# EAGLE board Satellite_Transceiver_Function_Board__Swarm_M138-Panel (EAGLE 9.6.2), part 1 of 2
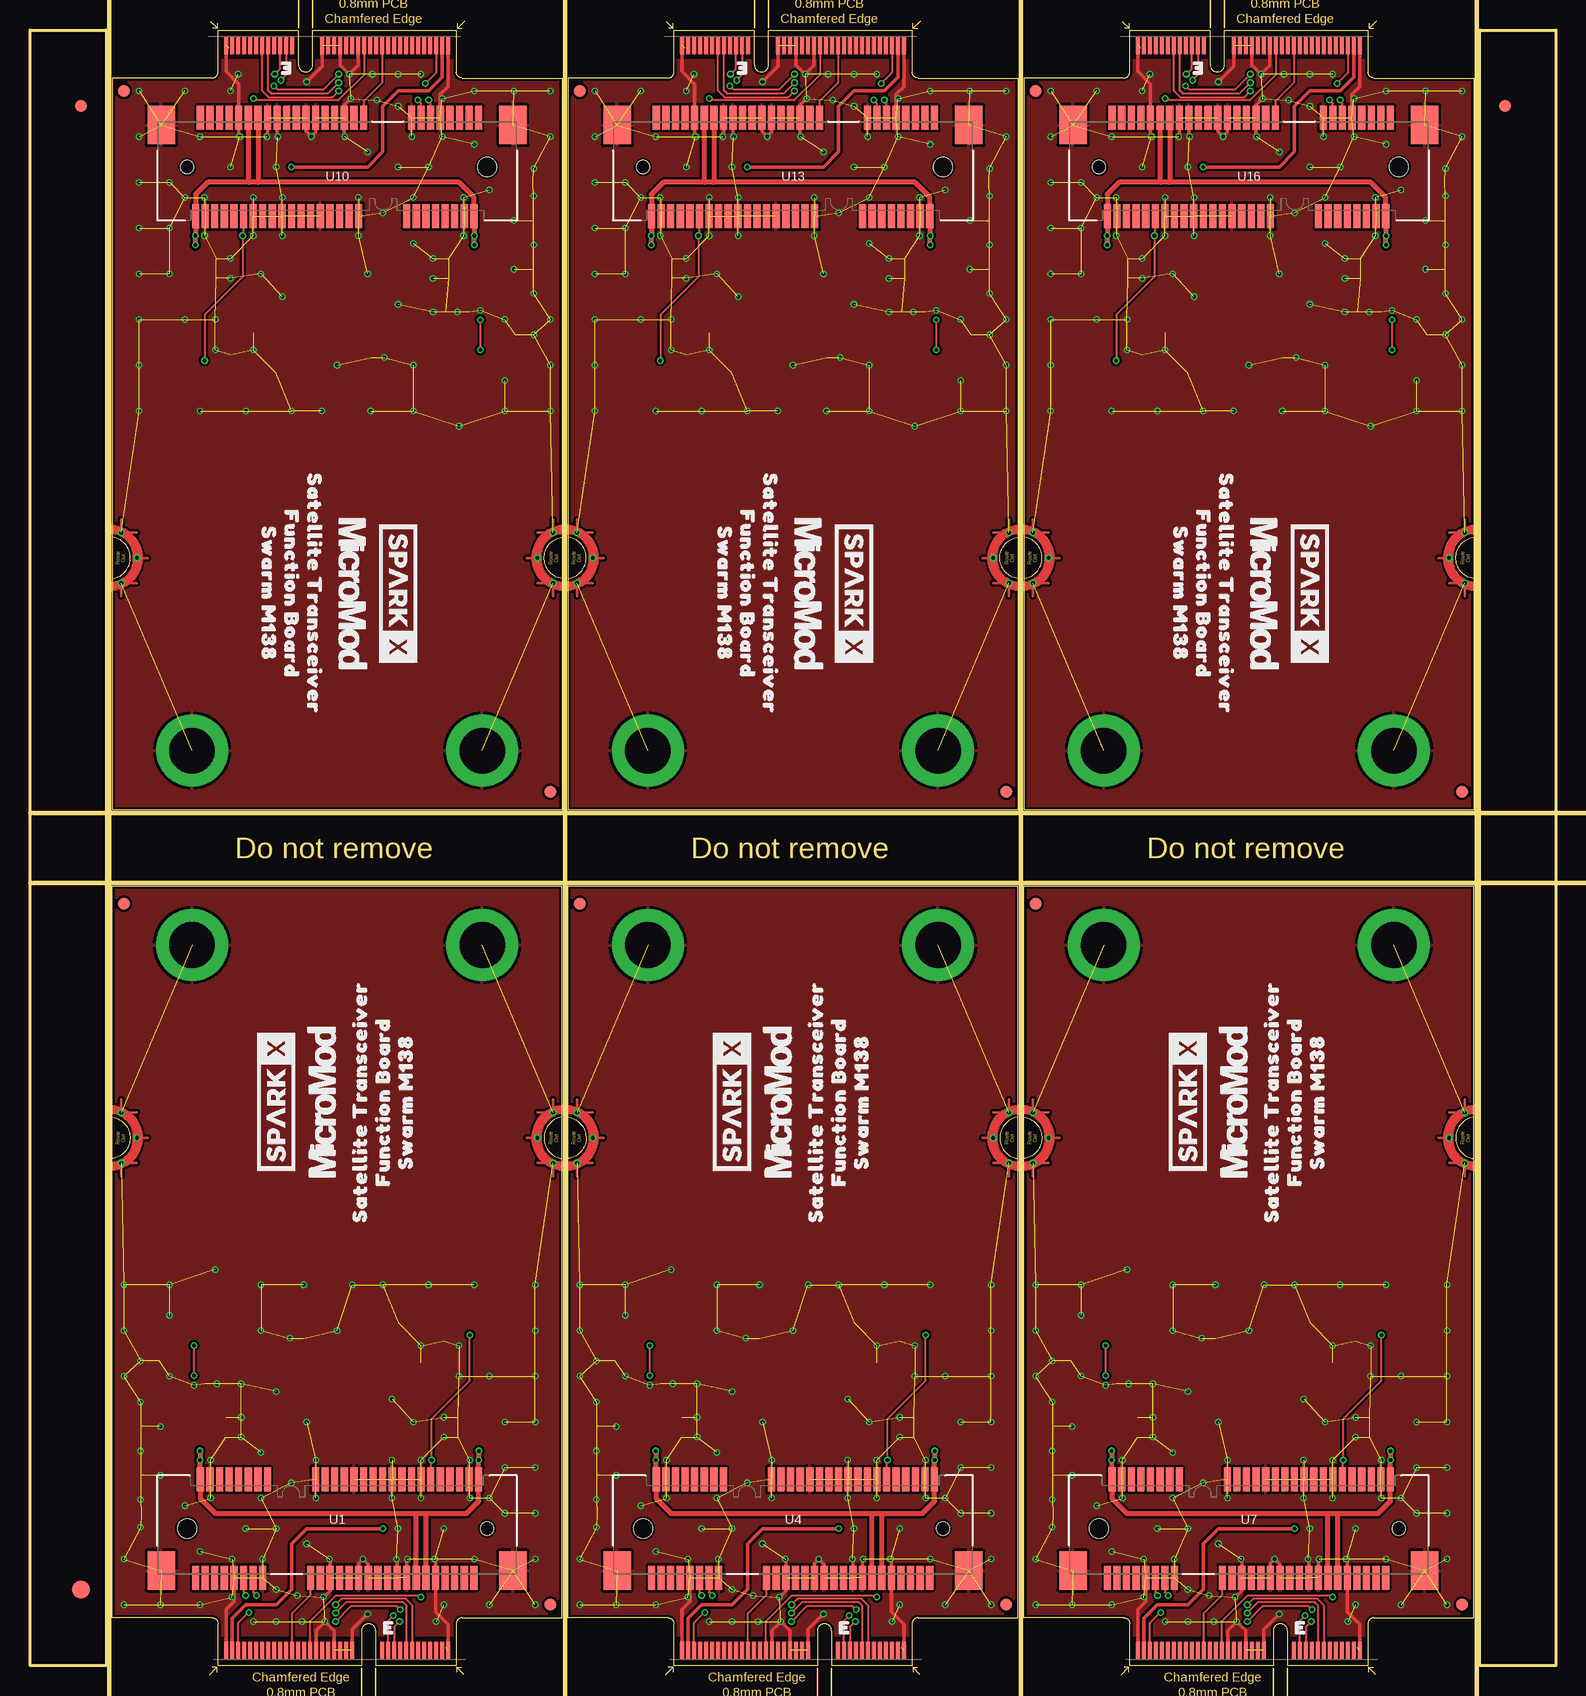
[diagram p0: board, top side]
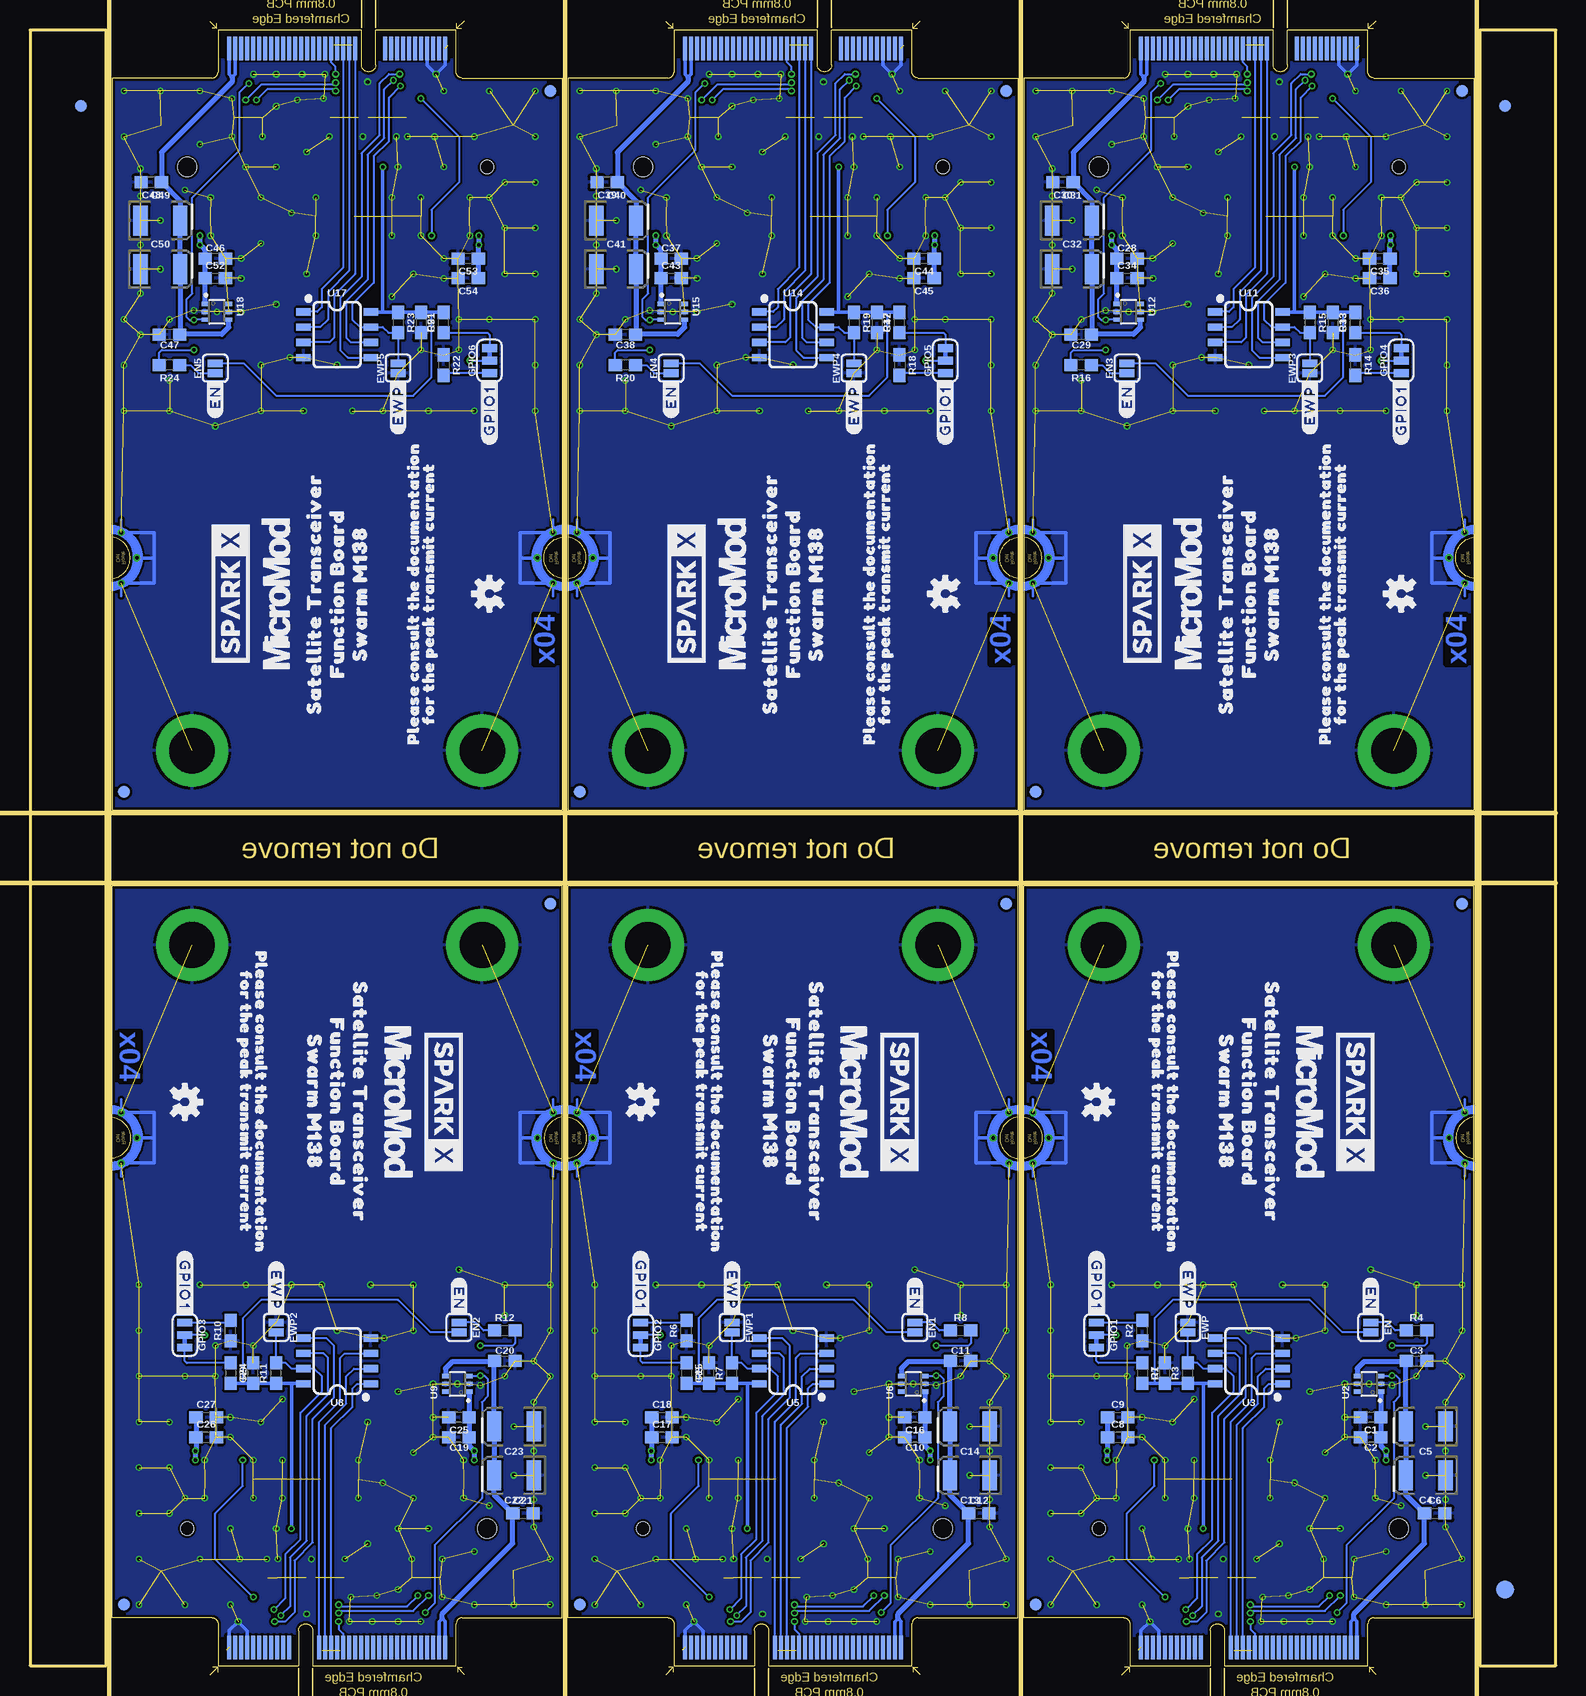
[diagram p1: board, bottom side, seen from below]

Size 127.21 x 136.35 mm. Coordinates in mm from the lower left corner, seen from the top.
Outline: 35.53,0 28.83,0 28.83,2.9 arc180 27.63,2.9 27.63,0 15.68,0 15.68,3.5 arc84 15.2,4 6.86,4 6.86,65 44.35,65 44.35,4 36,4 arc85 35.53,3.5 35.53,0
Outline: 73.53,0 66.83,0 66.83,2.9 arc180 65.63,2.9 65.63,0 53.68,0 53.68,3.5 arc84 53.2,4 44.86,4 44.86,65 82.35,65 82.35,4 74,4 arc85 73.53,3.5 73.53,0
Outline: 111.53,0 104.83,0 104.83,2.9 arc180 103.63,2.9 103.63,0 91.68,0 91.68,3.5 arc84 91.2,4 82.86,4 82.86,65 120.35,65 120.35,4 112,4 arc85 111.53,3.5 111.53,0
Outline: 15.68,136.35 22.38,136.35 22.38,133.45 arc180 23.58,133.45 23.58,136.35 35.53,136.35 35.53,132.85 arc84 36.01,132.35 44.35,132.35 44.35,71.35 6.86,71.35 6.86,132.35 15.21,132.35 arc85 15.68,132.85 15.68,136.35
Outline: 53.68,136.35 60.38,136.35 60.38,133.45 arc180 61.58,133.45 61.58,136.35 73.53,136.35 73.53,132.85 arc84 74,132.35 82.35,132.35 82.35,71.35 44.86,71.35 44.86,132.35 53.2,132.35 arc85 53.68,132.85 53.68,136.35
Outline: 91.68,136.35 98.38,136.35 98.38,133.45 arc180 99.58,133.45 99.58,136.35 111.53,136.35 111.53,132.85 arc84 112.01,132.35 120.35,132.35 120.35,71.35 82.86,71.35 82.86,132.35 91.2,132.35 arc85 91.68,132.85 91.68,136.35
Outline: 120.86,136.35 127.21,136.35 127.21,0 120.86,0 120.86,136.35
Outline: 0,136.35 6.35,136.35 6.35,0 0,0 0,136.35
Copper layers (1*16): Top 0.035mm / dielectric 1.5mm / Bottom 0.035mm
Design rules "Satellite_Transceiver_Function_Board__Swarm_M138": minimum track width 5mil, minimum drill 0.3mm, track to track 5mil, track to pad 5mil, pad to pad 5mil, via to via 5mil, smd to smd 5mil, copper to edge 7mil, drill to drill 7mil, minimum pad ring 5mil, minimum via ring 5mil, stop-mask expansion 2.5mil, vias tented up to drill 25mil, thermal gap 10mil
Net classes: 10 DIGITAL: width 0.09 mm, clearance 0.1 mm to class 0, clearance 0.1 mm to class 1, clearance 0.1 mm
tRestrict: 12 lines
Milling: 6 lines

## Footprints (pad centres in the part's own frame; a part is rotated, then mirrored left to right if it is on the bottom)
0603 = smd 1.1 x 1: 1 -0.85,0; 2 0.85,0
EIA3528 = smd 1.2 x 2.5: A 1.65,0; C -1.65,0
FIDUCIAL-1X2 = smd 1 x 1: 1 0,0
FIDUCIAL-1.5X3 = smd 1.5 x 1.5: 1 0,0
SMT-JUMPER_2_NO_SILK = smd 0.635 x 1.27: 1 -0.406,0; 2 0.406,0
SMT-JUMPER_3_1-NC_TRACE_SILK = smd 0.66 x 1.27: 1 -1.041,0; 2 0,0; 3 1.041,0
STAND-OFF-REFLOW-M2.5 = drill 3.8 pad 6: 1 0,0
M.2-CARD-E-22_FUNCTION_STANDARD = smd 0.35 x 1.45: 1 9.25,1.275; 3 8.75,1.275; 5 8.25,1.275; 7 7.75,1.275; 9 7.25,1.275; 11 6.75,1.275; 13 6.25,1.275; 15 5.75,1.275; 17 5.25,1.275; 19 4.75,1.275; 21 4.25,1.275; 23 3.75,1.275; 33 1.25,1.275; 35 0.75,1.275; 37 0.25,1.275; 39 -0.25,1.275; 41 -0.75,1.275; 43 -1.25,1.275; 45 -1.75,1.275; 47 -2.25,1.275; 49 -2.75,1.275; 51 -3.25,1.275; 53 -3.75,1.275; 55 -4.25,1.275; 57 -4.75,1.275; 59 -5.25,1.275; 61 -5.75,1.275; 63 -6.25,1.275; 65 -6.75,1.275; 67 -7.25,1.275; 69 -7.75,1.275; 71 -8.25,1.275; 73 -8.75,1.275; 75 -9.25,1.275 | smd 0.35 x 1.95 bottom: 2 9,1.525; 4 8.5,1.525; 6 8,1.525; 8 7.5,1.525; 10 7,1.525; 12 6.5,1.525; 14 6,1.525; 16 5.5,1.525; 18 5,1.525; 20 4.5,1.525; 22 4,1.525; 32 1.5,1.525; 34 1,1.525; 36 0.5,1.525; 38 0,1.525; 40 -0.5,1.525; 42 -1,1.525; 44 -1.5,1.525; 46 -2,1.525; 48 -2.5,1.525; 50 -3,1.525; 52 -3.5,1.525; 54 -4,1.525; 56 -4.5,1.525; 58 -5,1.525; 60 -5.5,1.525; 62 -6,1.525; 64 -6.5,1.525; 66 -7,1.525; 68 -7.5,1.525; 70 -8,1.525; 72 -8.5,1.525; 74 -9,1.525 | drill 0.305 pad 0.61: GND1 -18,41.9; GND2 -16.7,44; GND3 -18,46.1; GND4 18,41.9; GND5 16.7,44; GND6 18,46.1
M.2-SWARM-M138-A = smd 0.6 x 2: 1 -11.8,-4.1; 2 -11.4,4.1; 3 -11,-4.1; 4 -10.6,4.1; 5 -10.2,-4.1; 6 -9.8,4.1; 7 -9.4,-4.1; 8 -9,4.1; 9 -8.6,-4.1; 10 -8.2,4.1; 11 -7.8,-4.1; 12 -7.4,4.1; 13 -7,-4.1; 14 -6.6,4.1; 15 -6.2,-4.1; 16 -5.8,4.1; 17 -2.2,-4.1; 18 -1.8,4.1; 19 -1.4,-4.1; 20 -1,4.1; 21 -0.6,-4.1; 22 -0.2,4.1; 23 0.2,-4.1; 24 0.6,4.1; 25 1,-4.1; 26 1.4,4.1; 27 1.8,-4.1; 28 2.2,4.1; 29 2.6,-4.1; 30 3,4.1; 31 3.4,-4.1; 32 3.8,4.1; 33 4.2,-4.1; 34 4.6,4.1; 35 5,-4.1; 36 5.4,4.1; 37 5.8,-4.1; 38 6.2,4.1; 39 6.6,-4.1; 40 7,4.1; 41 7.4,-4.1; 42 7.8,4.1; 43 8.2,-4.1; 44 8.6,4.1; 45 9,-4.1; 46 9.4,4.1; 47 9.8,-4.1; 48 10.2,4.1; 49 10.6,-4.1; 50 11,4.1; 51 11.4,-4.1; 52 11.8,4.1 | smd 2.3 x 3.2: A1 -14.65,-3.5; A2 14.65,-3.5 | hole 1.1: 12.5,0 | hole 1.6: -12.5,0
SC-70-6 = smd 0.35 x 0.6: 1 -0.65,-1; 2 0,-1; 3 0.65,-1; 4 0.65,1; 5 0,1; 6 -0.65,1
SO08 = smd 0.6 x 1.2: 1 -1.905,-2.8; 2 -0.635,-2.8; 3 0.635,-2.8; 4 1.905,-2.8; 5 1.905,2.8; 6 0.635,2.8; 7 -0.635,2.8; 8 -1.905,2.8

## Placement (x,y rotation side)
C1  10uF  [0603]  15.44,20.7 180 bottom
C2  0.1uF  [0603]  15.44,19.05 180 bottom
C3  0.1uF  [0603]  11.63,25.4 0 bottom
C4  100uF  [EIA3528]  10.87,15.88 180 bottom
C5  100uF  [EIA3528]  10.87,19.94 180 bottom
C6  0.1uF  [0603]  10.11,12.7 0 bottom
C7  0.1uF  [0603]  32.59,24.38 90 bottom
C8  0.1uF  [0603]  36.53,19.05 0 bottom
C9  10uF  [0603]  36.53,20.7 0 bottom
C10  0.1uF  [0603]  53.44,19.05 180 bottom
C11  0.1uF  [0603]  49.63,25.4 0 bottom
C12  0.1uF  [0603]  48.11,12.7 0 bottom
C13  100uF  [EIA3528]  48.87,15.88 180 bottom
C14  100uF  [EIA3528]  48.87,19.94 180 bottom
C15  0.1uF  [0603]  70.59,24.38 90 bottom
C16  10uF  [0603]  53.44,20.7 180 bottom
C17  0.1uF  [0603]  74.53,19.05 0 bottom
C18  10uF  [0603]  74.53,20.7 0 bottom
C19  0.1uF  [0603]  91.44,19.05 180 bottom
C20  0.1uF  [0603]  87.63,25.4 0 bottom
C21  0.1uF  [0603]  86.11,12.7 0 bottom
C22  100uF  [EIA3528]  86.87,15.88 180 bottom
C23  100uF  [EIA3528]  86.87,19.94 180 bottom
C24  0.1uF  [0603]  108.59,24.38 90 bottom
C25  10uF  [0603]  91.44,20.7 180 bottom
C26  0.1uF  [0603]  112.52,19.05 0 bottom
C27  10uF  [0603]  112.52,20.7 0 bottom
C28  0.1uF  [0603]  35.77,117.3 0 bottom
C29  0.1uF  [0603]  39.58,110.95 180 bottom
C30  0.1uF  [0603]  41.1,123.65 180 bottom
C31  100uF  [EIA3528]  40.34,120.47 0 bottom
C32  100uF  [EIA3528]  40.34,116.41 0 bottom
C33  0.1uF  [0603]  18.62,111.97 270 bottom
C34  10uF  [0603]  35.77,115.65 0 bottom
C35  0.1uF  [0603]  14.68,117.3 180 bottom
C36  10uF  [0603]  14.68,115.65 180 bottom
C37  0.1uF  [0603]  73.76,117.3 0 bottom
C38  0.1uF  [0603]  77.57,110.95 180 bottom
C39  0.1uF  [0603]  79.1,123.65 180 bottom
C40  100uF  [EIA3528]  78.34,120.47 0 bottom
C41  100uF  [EIA3528]  78.34,116.41 0 bottom
C42  0.1uF  [0603]  56.62,111.97 270 bottom
C43  10uF  [0603]  73.76,115.65 0 bottom
C44  0.1uF  [0603]  52.68,117.3 180 bottom
C45  10uF  [0603]  52.68,115.65 180 bottom
C46  0.1uF  [0603]  111.77,117.3 0 bottom
C47  0.1uF  [0603]  115.58,110.95 180 bottom
C48  0.1uF  [0603]  117.1,123.65 180 bottom
C49  100uF  [EIA3528]  116.34,120.47 0 bottom
C50  100uF  [EIA3528]  116.34,116.41 0 bottom
C51  0.1uF  [0603]  94.62,111.97 270 bottom
C52  10uF  [0603]  111.77,115.65 0 bottom
C53  0.1uF  [0603]  90.68,117.3 180 bottom
C54  10uF  [0603]  90.68,115.65 180 bottom
E$1  [FIDUCIAL-1X2]  4.23,130 0 top
E$2  [FIDUCIAL-1X2]  4.23,130 0 bottom
E$3  [FIDUCIAL-1X2]  122.97,130 0 top
E$4  [FIDUCIAL-1X2]  122.97,130 0 bottom
E$5  [FIDUCIAL-1.5X3]  4.23,6.35 0 top
E$6  [FIDUCIAL-1.5X3]  4.23,6.35 0 bottom
EN  JUMPER-SMT_2_NO_SILK  [SMT-JUMPER_2_NO_SILK]  15.44,28.19 270 bottom
EN1  JUMPER-SMT_2_NO_SILK  [SMT-JUMPER_2_NO_SILK]  53.44,28.19 270 bottom
EN2  JUMPER-SMT_2_NO_SILK  [SMT-JUMPER_2_NO_SILK]  91.44,28.19 270 bottom
EN3  JUMPER-SMT_2_NO_SILK  [SMT-JUMPER_2_NO_SILK]  35.77,108.16 90 bottom
EN4  JUMPER-SMT_2_NO_SILK  [SMT-JUMPER_2_NO_SILK]  73.76,108.16 90 bottom
EN5  JUMPER-SMT_2_NO_SILK  [SMT-JUMPER_2_NO_SILK]  111.77,108.16 90 bottom
EWP  JUMPER-SMT_2_NO_SILK  [SMT-JUMPER_2_NO_SILK]  30.68,28.19 270 bottom
EWP1  JUMPER-SMT_2_NO_SILK  [SMT-JUMPER_2_NO_SILK]  68.68,28.19 270 bottom
EWP2  JUMPER-SMT_2_NO_SILK  [SMT-JUMPER_2_NO_SILK]  106.68,28.19 270 bottom
EWP3  JUMPER-SMT_2_NO_SILK  [SMT-JUMPER_2_NO_SILK]  20.53,108.16 90 bottom
EWP4  JUMPER-SMT_2_NO_SILK  [SMT-JUMPER_2_NO_SILK]  58.52,108.16 90 bottom
EWP5  JUMPER-SMT_2_NO_SILK  [SMT-JUMPER_2_NO_SILK]  96.53,108.16 90 bottom
FD1  FIDUCIAL1X2  [FIDUCIAL-1X2]  43.38,5.08 0 top
FD2  FIDUCIAL1X2  [FIDUCIAL-1X2]  43.38,5.08 0 bottom
FD3  FIDUCIAL1X2  [FIDUCIAL-1X2]  7.82,63.5 0 top
FD4  FIDUCIAL1X2  [FIDUCIAL-1X2]  7.82,63.5 0 bottom
FD5  FIDUCIAL1X2  [FIDUCIAL-1X2]  81.38,5.08 0 top
FD6  FIDUCIAL1X2  [FIDUCIAL-1X2]  81.38,5.08 0 bottom
FD7  FIDUCIAL1X2  [FIDUCIAL-1X2]  45.82,63.5 0 top
FD8  FIDUCIAL1X2  [FIDUCIAL-1X2]  45.82,63.5 0 bottom
FD9  FIDUCIAL1X2  [FIDUCIAL-1X2]  119.38,5.08 0 top
FD10  FIDUCIAL1X2  [FIDUCIAL-1X2]  119.38,5.08 0 bottom
FD11  FIDUCIAL1X2  [FIDUCIAL-1X2]  83.82,63.5 0 top
FD12  FIDUCIAL1X2  [FIDUCIAL-1X2]  83.82,63.5 0 bottom
FD13  FIDUCIAL1X2  [FIDUCIAL-1X2]  7.83,131.27 180 top
FD14  FIDUCIAL1X2  [FIDUCIAL-1X2]  7.83,131.27 180 bottom
FD15  FIDUCIAL1X2  [FIDUCIAL-1X2]  43.39,72.85 180 top
FD16  FIDUCIAL1X2  [FIDUCIAL-1X2]  43.39,72.85 180 bottom
FD17  FIDUCIAL1X2  [FIDUCIAL-1X2]  45.82,131.27 180 top
FD18  FIDUCIAL1X2  [FIDUCIAL-1X2]  45.82,131.27 180 bottom
FD19  FIDUCIAL1X2  [FIDUCIAL-1X2]  81.38,72.85 180 top
FD20  FIDUCIAL1X2  [FIDUCIAL-1X2]  81.38,72.85 180 bottom
FD21  FIDUCIAL1X2  [FIDUCIAL-1X2]  83.83,131.27 180 top
FD22  FIDUCIAL1X2  [FIDUCIAL-1X2]  83.83,131.27 180 bottom
FD23  FIDUCIAL1X2  [FIDUCIAL-1X2]  119.39,72.85 180 top
FD24  FIDUCIAL1X2  [FIDUCIAL-1X2]  119.39,72.85 180 bottom
GPIO1  JUMPER-SMT_3_1-NC_TRACE_SILK  [SMT-JUMPER_3_1-NC_TRACE_SILK]  38.3,27.56 270 bottom
GPIO2  JUMPER-SMT_3_1-NC_TRACE_SILK  [SMT-JUMPER_3_1-NC_TRACE_SILK]  76.3,27.56 270 bottom
GPIO3  JUMPER-SMT_3_1-NC_TRACE_SILK  [SMT-JUMPER_3_1-NC_TRACE_SILK]  114.3,27.56 270 bottom
GPIO4  JUMPER-SMT_3_1-NC_TRACE_SILK  [SMT-JUMPER_3_1-NC_TRACE_SILK]  12.91,108.79 90 bottom
GPIO5  JUMPER-SMT_3_1-NC_TRACE_SILK  [SMT-JUMPER_3_1-NC_TRACE_SILK]  50.9,108.79 90 bottom
GPIO6  JUMPER-SMT_3_1-NC_TRACE_SILK  [SMT-JUMPER_3_1-NC_TRACE_SILK]  88.91,108.79 90 bottom
H1  STAND-OFF-REFLOW-M2.5_1.5MM_TALL  [STAND-OFF-REFLOW-M2.5]  51.5,60.08 0 top
H2  STAND-OFF-REFLOW-M2.5_1.5MM_TALL  [STAND-OFF-REFLOW-M2.5]  75.7,60.08 0 top
H3  STAND-OFF-REFLOW-M2.5_1.5MM_TALL  [STAND-OFF-REFLOW-M2.5]  89.5,60.08 0 top
H4  STAND-OFF-REFLOW-M2.5_1.5MM_TALL  [STAND-OFF-REFLOW-M2.5]  113.7,60.08 0 top
H5  STAND-OFF-REFLOW-M2.5_1.5MM_TALL  [STAND-OFF-REFLOW-M2.5]  13.5,60.08 0 top
H6  STAND-OFF-REFLOW-M2.5_1.5MM_TALL  [STAND-OFF-REFLOW-M2.5]  37.7,60.08 0 top
H7  STAND-OFF-REFLOW-M2.5_1.5MM_TALL  [STAND-OFF-REFLOW-M2.5]  37.71,76.27 180 top
H8  STAND-OFF-REFLOW-M2.5_1.5MM_TALL  [STAND-OFF-REFLOW-M2.5]  13.51,76.27 180 top
H9  STAND-OFF-REFLOW-M2.5_1.5MM_TALL  [STAND-OFF-REFLOW-M2.5]  75.7,76.27 180 top
H10  STAND-OFF-REFLOW-M2.5_1.5MM_TALL  [STAND-OFF-REFLOW-M2.5]  51.5,76.27 180 top
H11  STAND-OFF-REFLOW-M2.5_1.5MM_TALL  [STAND-OFF-REFLOW-M2.5]  113.71,76.27 180 top
H12  STAND-OFF-REFLOW-M2.5_1.5MM_TALL  [STAND-OFF-REFLOW-M2.5]  89.5,76.27 180 top
J1  MICROMOD_FUNCTION_STANDARD  [M.2-CARD-E-22_FUNCTION_STANDARD]  63.6,0 0 top
J2  MICROMOD_FUNCTION_STANDARD  [M.2-CARD-E-22_FUNCTION_STANDARD]  101.6,0 0 top
J3  MICROMOD_FUNCTION_STANDARD  [M.2-CARD-E-22_FUNCTION_STANDARD]  25.6,0 0 top
J4  MICROMOD_FUNCTION_STANDARD  [M.2-CARD-E-22_FUNCTION_STANDARD]  25.61,136.35 180 top
J5  MICROMOD_FUNCTION_STANDARD  [M.2-CARD-E-22_FUNCTION_STANDARD]  63.6,136.35 180 top
J6  MICROMOD_FUNCTION_STANDARD  [M.2-CARD-E-22_FUNCTION_STANDARD]  101.61,136.35 180 top
LOGO1  OSHW-LOGOS  [OSHW-LOGO-S]  76.3,46.99 270 bottom
LOGO2  OSHW-LOGOS  [OSHW-LOGO-S]  38.3,46.99 270 bottom
LOGO3  OSHW-LOGOS  [OSHW-LOGO-S]  114.3,46.99 270 bottom
LOGO4  OSHW-LOGOS  [OSHW-LOGO-S]  12.91,89.36 90 bottom
LOGO5  OSHW-LOGOS  [OSHW-LOGO-S]  50.9,89.36 90 bottom
LOGO6  OSHW-LOGOS  [OSHW-LOGO-S]  88.91,89.36 90 bottom
R1  100k  [0603]  34.49,24.38 270 bottom
R2  100k  [0603]  34.49,27.94 90 bottom
R3  100k  [0603]  30.68,24.38 90 bottom
R4  100k  [0603]  11.63,27.94 0 bottom
R5  100k  [0603]  72.49,24.38 270 bottom
R6  100k  [0603]  72.49,27.94 90 bottom
R7  100k  [0603]  68.68,24.38 90 bottom
R8  100k  [0603]  49.63,27.94 0 bottom
R9  100k  [0603]  110.49,24.38 270 bottom
R10  100k  [0603]  110.49,27.94 90 bottom
R11  100k  [0603]  106.68,24.38 90 bottom
R12  100k  [0603]  87.63,27.94 0 bottom
R13  100k  [0603]  16.72,111.97 90 bottom
R14  100k  [0603]  16.72,108.41 270 bottom
R15  100k  [0603]  20.53,111.97 270 bottom
R16  100k  [0603]  39.58,108.41 180 bottom
R17  100k  [0603]  54.71,111.97 90 bottom
R18  100k  [0603]  54.71,108.41 270 bottom
R19  100k  [0603]  58.52,111.97 270 bottom
R20  100k  [0603]  77.57,108.41 180 bottom
R21  100k  [0603]  92.72,111.97 90 bottom
R22  100k  [0603]  92.72,108.41 270 bottom
R23  100k  [0603]  96.53,111.97 270 bottom
R24  100k  [0603]  115.58,108.41 180 bottom
U1  SWARM_M138_TRANSCEIVER_MAIN  [M.2-SWARM-M138-A]  25.6,11.43 0 top
U2  MIC94064YC6  [SC-70-6]  15.57,23.5 90 bottom
U3  EEPROM  [SO08]  25.6,25.4 90 bottom
U4  SWARM_M138_TRANSCEIVER_MAIN  [M.2-SWARM-M138-A]  63.6,11.43 0 top
U5  EEPROM  [SO08]  63.6,25.4 90 bottom
U6  MIC94064YC6  [SC-70-6]  53.57,23.5 90 bottom
U7  SWARM_M138_TRANSCEIVER_MAIN  [M.2-SWARM-M138-A]  101.6,11.43 0 top
U8  EEPROM  [SO08]  101.6,25.4 90 bottom
U9  MIC94064YC6  [SC-70-6]  91.57,23.5 90 bottom
U10  SWARM_M138_TRANSCEIVER_MAIN  [M.2-SWARM-M138-A]  25.61,124.92 180 top
U11  EEPROM  [SO08]  25.61,110.95 270 bottom
U12  MIC94064YC6  [SC-70-6]  35.64,112.85 270 bottom
U13  SWARM_M138_TRANSCEIVER_MAIN  [M.2-SWARM-M138-A]  63.6,124.92 180 top
U14  EEPROM  [SO08]  63.6,110.95 270 bottom
U15  MIC94064YC6  [SC-70-6]  73.64,112.85 270 bottom
U16  SWARM_M138_TRANSCEIVER_MAIN  [M.2-SWARM-M138-A]  101.61,124.92 180 top
U17  EEPROM  [SO08]  101.61,110.95 270 bottom
U18  MIC94064YC6  [SC-70-6]  111.64,112.85 270 bottom
U$1  SPARKX-LOGO5  [SPARKX-LARGE]  16.71,46.99 270 bottom
U$2  SPARKX-LOGO5  [SPARKX-LARGE]  20.52,46.99 90 top
U$3  [FUNCTION_BOARD0]  29.41,46.99 90 top
U$4  [SATELLITE_TRANSCEIVER0]  27.51,46.99 90 top
U$5  [SATELLITE_TRANSCEIVER0]  23.7,46.99 270 bottom
U$6  [PLEASE_CONSULT_THE_DOCUMENTATION0]  31.95,46.99 270 bottom
U$7  [FUNCTION_BOARD0]  25.6,46.99 270 bottom
U$8  [#EWP#0]  30.68,28.96 270 bottom
U$9  [MICROMOD_LOGO_.5]  24.33,46.99 90 top
U$10  [MICROMOD_LOGO_.5]  20.52,46.99 270 bottom
U$11  [#EN#0]  15.44,28.96 270 bottom
U$12  SPARKX-LOGO5  [SPARKX-LARGE]  54.71,46.99 270 bottom
U$13  SPARKX-LOGO5  [SPARKX-LARGE]  58.52,46.99 90 top
U$14  [#GPIO1#0]  76.3,28.96 270 bottom
U$15  [SWARM_M1381]  69.32,46.99 90 top
U$16  [SWARM_M1381]  65.51,46.99 270 bottom
U$17  [PLEASE_CONSULT_THE_DOCUMENTATION0]  69.95,46.99 270 bottom
U$18  [FOR_THE_PEAK_TRANSMIT_CURRENT1]  71.22,46.99 270 bottom
U$19  [#GPIO1#0]  38.3,28.96 270 bottom
U$20  [FUNCTION_BOARD0]  67.41,46.99 90 top
U$21  [SATELLITE_TRANSCEIVER0]  65.51,46.99 90 top
U$22  [SATELLITE_TRANSCEIVER0]  61.7,46.99 270 bottom
U$23  [FUNCTION_BOARD0]  63.6,46.99 270 bottom
U$24  [#EWP#0]  68.68,28.96 270 bottom
U$25  [MICROMOD_LOGO_.5]  62.33,46.99 90 top
U$26  [MICROMOD_LOGO_.5]  58.52,46.99 270 bottom
U$27  [#EN#0]  53.44,28.96 270 bottom
U$28  SPARKX-LOGO5  [SPARKX-LARGE]  92.71,46.99 270 bottom
U$29  SPARKX-LOGO5  [SPARKX-LARGE]  96.52,46.99 90 top
U$30  [#GPIO1#0]  114.3,28.96 270 bottom
U$31  [FOR_THE_PEAK_TRANSMIT_CURRENT1]  33.22,46.99 270 bottom
U$32  [SWARM_M1381]  107.32,46.99 90 top
U$33  [SWARM_M1381]  103.51,46.99 270 bottom
U$34  [PLEASE_CONSULT_THE_DOCUMENTATION0]  107.95,46.99 270 bottom
U$35  [FOR_THE_PEAK_TRANSMIT_CURRENT1]  109.22,46.99 270 bottom
U$36  [FUNCTION_BOARD0]  105.41,46.99 90 top
U$37  [SATELLITE_TRANSCEIVER0]  103.51,46.99 90 top
U$38  [SATELLITE_TRANSCEIVER0]  99.7,46.99 270 bottom
U$39  [FUNCTION_BOARD0]  101.6,46.99 270 bottom
U$40  [SWARM_M1381]  31.32,46.99 90 top
U$41  [SWARM_M1381]  27.51,46.99 270 bottom
U$42  [#EWP#0]  106.68,28.96 270 bottom
U$43  [MICROMOD_LOGO_.5]  100.33,46.99 90 top
U$44  [MICROMOD_LOGO_.5]  96.52,46.99 270 bottom
U$45  [#EN#0]  91.44,28.96 270 bottom
U$46  SPARKX-LOGO5  [SPARKX-LARGE]  34.5,89.36 90 bottom
U$47  SPARKX-LOGO5  [SPARKX-LARGE]  30.69,89.36 270 top
U$48  [#GPIO1#0]  12.91,107.39 90 bottom
U$49  [SWARM_M1381]  19.89,89.36 270 top
U$50  [SWARM_M1381]  23.7,89.36 90 bottom
U$51  [PLEASE_CONSULT_THE_DOCUMENTATION0]  19.26,89.36 90 bottom
U$52  [FOR_THE_PEAK_TRANSMIT_CURRENT1]  17.99,89.36 90 bottom
U$53  [FUNCTION_BOARD0]  21.8,89.36 270 top
U$54  [SATELLITE_TRANSCEIVER0]  23.7,89.36 270 top
U$55  [SATELLITE_TRANSCEIVER0]  27.51,89.36 90 bottom
U$56  [FUNCTION_BOARD0]  25.61,89.36 90 bottom
U$57  [#EWP#0]  20.53,107.39 90 bottom
U$58  [MICROMOD_LOGO_.5]  26.88,89.36 270 top
U$59  [MICROMOD_LOGO_.5]  30.69,89.36 90 bottom
U$60  [#EN#0]  35.77,107.39 90 bottom
U$61  SPARKX-LOGO5  [SPARKX-LARGE]  72.49,89.36 90 bottom
U$62  SPARKX-LOGO5  [SPARKX-LARGE]  68.68,89.36 270 top
U$63  [#GPIO1#0]  50.9,107.39 90 bottom
U$64  [SWARM_M1381]  57.89,89.36 270 top
U$65  [SWARM_M1381]  61.7,89.36 90 bottom
U$66  [PLEASE_CONSULT_THE_DOCUMENTATION0]  57.25,89.36 90 bottom
U$67  [FOR_THE_PEAK_TRANSMIT_CURRENT1]  55.98,89.36 90 bottom
U$68  [FUNCTION_BOARD0]  59.79,89.36 270 top
U$69  [SATELLITE_TRANSCEIVER0]  61.7,89.36 270 top
U$70  [SATELLITE_TRANSCEIVER0]  65.51,89.36 90 bottom
U$71  [FUNCTION_BOARD0]  63.6,89.36 90 bottom
U$72  [#EWP#0]  58.52,107.39 90 bottom
U$73  [MICROMOD_LOGO_.5]  64.87,89.36 270 top
U$74  [MICROMOD_LOGO_.5]  68.68,89.36 90 bottom
U$75  [#EN#0]  73.76,107.39 90 bottom
U$76  SPARKX-LOGO5  [SPARKX-LARGE]  110.5,89.36 90 bottom
U$77  SPARKX-LOGO5  [SPARKX-LARGE]  106.69,89.36 270 top
U$78  [#GPIO1#0]  88.91,107.39 90 bottom
U$79  [SWARM_M1381]  95.89,89.36 270 top
U$80  [SWARM_M1381]  99.7,89.36 90 bottom
U$81  [PLEASE_CONSULT_THE_DOCUMENTATION0]  95.26,89.36 90 bottom
U$82  [FOR_THE_PEAK_TRANSMIT_CURRENT1]  93.99,89.36 90 bottom
U$83  [FUNCTION_BOARD0]  97.8,89.36 270 top
U$84  [SATELLITE_TRANSCEIVER0]  99.7,89.36 270 top
U$85  [SATELLITE_TRANSCEIVER0]  103.51,89.36 90 bottom
U$86  [FUNCTION_BOARD0]  101.61,89.36 90 bottom
U$87  [#EWP#0]  96.53,107.39 90 bottom
U$88  [MICROMOD_LOGO_.5]  102.88,89.36 270 top
U$89  [MICROMOD_LOGO_.5]  106.69,89.36 90 bottom
U$90  [#EN#0]  111.77,107.39 90 bottom

## Library data of the parts
C1 C9 C16 C18 C25 C27 C34 C36 C43 C45 C52 C54 = SparkFun-Capacitors; PROD_ID: CAP-11015
C2 C3 C6-C8 C10-C12 C15 C17 C19-C21 C24 C26 C28-C30 C33 C35 C37-C39 C42 C44 C46-C48 C51 C53 = SparkFun-Capacitors; PROD_ID: CAP-08604
C4 C5 C13 C14 C22 C23 C31 C32 C40 C41 C49 C50 = SparkFun-Capacitors; PROD_ID: CAP-16823
E$1-E$4 FD1-FD24 LOGO1-LOGO6 = SparkFun-Aesthetics
E$5 E$6 = SparkFun-Retired
EN EN1-EN5 EWP EWP1-EWP5 GPIO1-GPIO6 = SparkFun-Jumpers
H1-H12 = SparkFun-Hardware; PROD_ID: HW-16629
J1-J6 U$9 U$10 U$25 U$26 U$43 U$44 U$58 U$59 U$73 U$74 U$88 U$89 = SparkFun-MicroMod
R1-R24 = SparkFun-Resistors; PROD_ID: RES-07828
U1 U4 U7 U10 U13 U16 = SparkFun-RF; PROD_ID: CONN-16558
U2 U6 U9 U12 U15 U18 = SparkFun-IC-Power; PROD_ID: IC-16794
U3 U5 U8 U11 U14 U17 = SparkFun-IC-Memory; PROD_ID: IC-14645
U$1 U$2 U$12 U$13 U$28 U$29 U$46 U$47 U$61 U$62 U$76 U$77 = SparkX
U$3-U$8 U$11 U$14-U$24 U$27 U$30-U$42 U$45 U$48-U$57 U$60 U$63-U$72 U$75 U$78-U$87 U$90 = output

## Nets
3.3V: C7.1 EN.2 J3.73 R1.2 R3.1 U3.8
3.3V1: C15.1 EN1.2 J1.73 R5.2 R7.1 U5.8
3.3V2: C24.1 EN2.2 J2.73 R9.2 R11.1 U8.8
3.3V3: C33.1 EN3.2 J4.73 R13.2 R15.1 U11.8
3.3V4: C42.1 EN4.2 J5.73 R17.2 R19.1 U14.8
3.3V5: C51.1 EN5.2 J6.73 R21.2 R23.1 U17.8
A0 [DIGITAL]: J3.36 U3.1
A1 [DIGITAL]: J3.34 U3.2
A2 [DIGITAL]: J3.32 U3.3
A3 [DIGITAL]: J1.36 U5.1
A4 [DIGITAL]: J1.32 U5.3
A5 [DIGITAL]: J1.34 U5.2
A6 [DIGITAL]: J2.36 U8.1
A7 [DIGITAL]: J2.32 U8.3
A8 [DIGITAL]: J2.34 U8.2
A9 [DIGITAL]: J4.36 U11.1
A10 [DIGITAL]: J4.32 U11.3
A11 [DIGITAL]: J4.34 U11.2
A12 [DIGITAL]: J5.36 U14.1
A13 [DIGITAL]: J5.32 U14.3
A14 [DIGITAL]: J5.34 U14.2
A15 [DIGITAL]: J6.36 U17.1
A16 [DIGITAL]: J6.32 U17.3
A17 [DIGITAL]: J6.34 U17.2
EWP [DIGITAL]: EWP.2 J3.40 R3.2 U3.7
EWP1 [DIGITAL]: EWP1.2 J1.40 R7.2 U5.7
EWP2 [DIGITAL]: EWP2.2 J2.40 R11.2 U8.7
EWP3 [DIGITAL]: EWP3.2 J4.40 R15.2 U11.7
EWP4 [DIGITAL]: EWP4.2 J5.40 R19.2 U14.7
EWP5 [DIGITAL]: EWP5.2 J6.40 R23.2 U17.7
GND: C1.2 C2.2 C3.2 C4.C C5.C C6.2 C7.2 C8.2 C9.2 EWP.1 H5.1 H6.1 J3.1 J3.2 J3.8 J3.33 J3.39 J3.45 J3.75 J3.GND1 J3.GND2 J3.GND3 J3.GND4 J3.GND5 J3.GND6 R2.1 U1.4 U1.9 U1.15 U1.18 U1.21 U1.26 U1.27 U1.29 U1.34 U1.35 U1.37 U1.40 U1.43 U1.50 U1.A1 U1.A2 U2.2 U2.5 U3.4
GND1: C10.2 C11.2 C12.2 C13.C C14.C C15.2 C16.2 C17.2 C18.2 EWP1.1 H1.1 H2.1 J1.1 J1.2 J1.8 J1.33 J1.39 J1.45 J1.75 J1.GND1 J1.GND2 J1.GND3 J1.GND4 J1.GND5 J1.GND6 R6.1 U4.4 U4.9 U4.15 U4.18 U4.21 U4.26 U4.27 U4.29 U4.34 U4.35 U4.37 U4.40 U4.43 U4.50 U4.A1 U4.A2 U5.4 U6.2 U6.5
GND2: C19.2 C20.2 C21.2 C22.C C23.C C24.2 C25.2 C26.2 C27.2 EWP2.1 H3.1 H4.1 J2.1 J2.2 J2.8 J2.33 J2.39 J2.45 J2.75 J2.GND1 J2.GND2 J2.GND3 J2.GND4 J2.GND5 J2.GND6 R10.1 U7.4 U7.9 U7.15 U7.18 U7.21 U7.26 U7.27 U7.29 U7.34 U7.35 U7.37 U7.40 U7.43 U7.50 U7.A1 U7.A2 U8.4 U9.2 U9.5
GND3: C28.2 C29.2 C30.2 C31.C C32.C C33.2 C34.2 C35.2 C36.2 EWP3.1 H7.1 H8.1 J4.1 J4.2 J4.8 J4.33 J4.39 J4.45 J4.75 J4.GND1 J4.GND2 J4.GND3 J4.GND4 J4.GND5 J4.GND6 R14.1 U10.4 U10.9 U10.15 U10.18 U10.21 U10.26 U10.27 U10.29 U10.34 U10.35 U10.37 U10.40 U10.43 U10.50 U10.A1 U10.A2 U11.4 U12.2 U12.5
GND4: C37.2 C38.2 C39.2 C40.C C41.C C42.2 C43.2 C44.2 C45.2 EWP4.1 H9.1 H10.1 J5.1 J5.2 J5.8 J5.33 J5.39 J5.45 J5.75 J5.GND1 J5.GND2 J5.GND3 J5.GND4 J5.GND5 J5.GND6 R18.1 U13.4 U13.9 U13.15 U13.18 U13.21 U13.26 U13.27 U13.29 U13.34 U13.35 U13.37 U13.40 U13.43 U13.50 U13.A1 U13.A2 U14.4 U15.2 U15.5
GND5: C46.2 C47.2 C48.2 C49.C C50.C C51.2 C52.2 C53.2 C54.2 EWP5.1 H11.1 H12.1 J6.1 J6.2 J6.8 J6.33 J6.39 J6.45 J6.75 J6.GND1 J6.GND2 J6.GND3 J6.GND4 J6.GND5 J6.GND6 R22.1 U16.4 U16.9 U16.15 U16.18 U16.21 U16.26 U16.27 U16.29 U16.34 U16.35 U16.37 U16.40 U16.43 U16.50 U16.A1 U16.A2 U17.4 U18.2 U18.5
GPIO1: GPIO1.2 J3.47 U1.42
GPIO2: GPIO2.2 J1.47 U4.42
GPIO3: GPIO3.2 J2.47 U7.42
GPIO4: GPIO4.2 J4.47 U10.42
GPIO5: GPIO5.2 J5.47 U13.42
GPIO6: GPIO6.2 J6.47 U16.42
N$1: EN.1 R4.1
N$2: GPIO2.3 R5.1
N$3: GPIO2.1 R6.2
N$4: EN1.1 R8.1
N$5: GPIO3.3 R9.1
N$6: GPIO3.1 R10.2
N$7: EN2.1 R12.1
N$8: GPIO4.3 R13.1
N$9: GPIO4.1 R14.2
N$10: EN3.1 R16.1
N$11: GPIO5.3 R17.1
N$12: GPIO5.1 R18.2
N$13: EN4.1 R20.1
N$14: GPIO1.3 R1.1
N$15: GPIO6.3 R21.1
N$16: GPIO1.1 R2.2
N$17: GPIO6.1 R22.2
N$18: EN5.1 R24.1
PWR_EN: J3.71 R4.2 U2.3
PWR_EN1: J1.71 R8.2 U6.3
PWR_EN2: J2.71 R12.2 U9.3
PWR_EN3: J4.71 R16.2 U12.3
PWR_EN4: J5.71 R20.2 U15.3
PWR_EN5: J6.71 R24.2 U18.3
RXI: J3.15 U1.11
RXI1: J1.15 U4.11
RXI2: J2.15 U7.11
RXI3: J4.15 U10.11
RXI4: J5.15 U13.11
RXI5: J6.15 U16.11
SCL [DIGITAL]: J3.21 U3.6
SCL1 [DIGITAL]: J1.21 U5.6
SCL2 [DIGITAL]: J2.21 U8.6
SCL3 [DIGITAL]: J4.21 U11.6
SCL4 [DIGITAL]: J5.21 U14.6
SCL5 [DIGITAL]: J6.21 U17.6
SDA [DIGITAL]: J3.19 U3.5
SDA1 [DIGITAL]: J1.19 U5.5
SDA2 [DIGITAL]: J2.19 U8.5
SDA3 [DIGITAL]: J4.19 U11.5
SDA4 [DIGITAL]: J5.19 U14.5
SDA5 [DIGITAL]: J6.19 U17.5
TX/!RX!: J3.53 U1.17
TX/!RX!1: J1.53 U4.17
TX/!RX!2: J2.53 U7.17
TX/!RX!3: J4.53 U10.17
TX/!RX!4: J5.53 U13.17
TX/!RX!5: J6.53 U16.17
TXO: J3.13 U1.13
TXO1: J1.13 U4.13
TXO2: J2.13 U7.13
TXO3: J4.13 U10.13
TXO4: J5.13 U13.13
TXO5: J6.13 U16.13
VCC: C3.1 C4.A C5.A C6.1 J3.72 J3.74 U2.4
VCC1: C11.1 C12.1 C13.A C14.A J1.72 J1.74 U6.4
VCC2: C20.1 C21.1 C22.A C23.A J2.72 J2.74 U9.4
VCC3: C29.1 C30.1 C31.A C32.A J4.72 J4.74 U12.4
VCC4: C38.1 C39.1 C40.A C41.A J5.72 J5.74 U15.4
VCC5: C47.1 C48.1 C49.A C50.A J6.72 J6.74 U18.4
VIN: C1.1 C2.1 C8.1 C9.1 U1.2 U1.39 U1.41 U1.52 U2.1
VIN1: C10.1 C16.1 C17.1 C18.1 U4.2 U4.39 U4.41 U4.52 U6.1
VIN2: C19.1 C25.1 C26.1 C27.1 U7.2 U7.39 U7.41 U7.52 U9.1
VIN3: C28.1 C34.1 C35.1 C36.1 U10.2 U10.39 U10.41 U10.52 U12.1
VIN4: C37.1 C43.1 C44.1 C45.1 U13.2 U13.39 U13.41 U13.52 U15.1
VIN5: C46.1 C52.1 C53.1 C54.1 U16.2 U16.39 U16.41 U16.52 U18.1